# Altium PCB PCB3.PcbDoc (part 1 of 2)
Units mm, origin at the board's own origin, x right, y up, seen from the top; angles counter-clockwise.
Board outline 51.84 x 50.17 mm, 2 copper layers (Top Layer, Bottom Layer); 59 components, 46 nets, 207 pads, 49 vias.
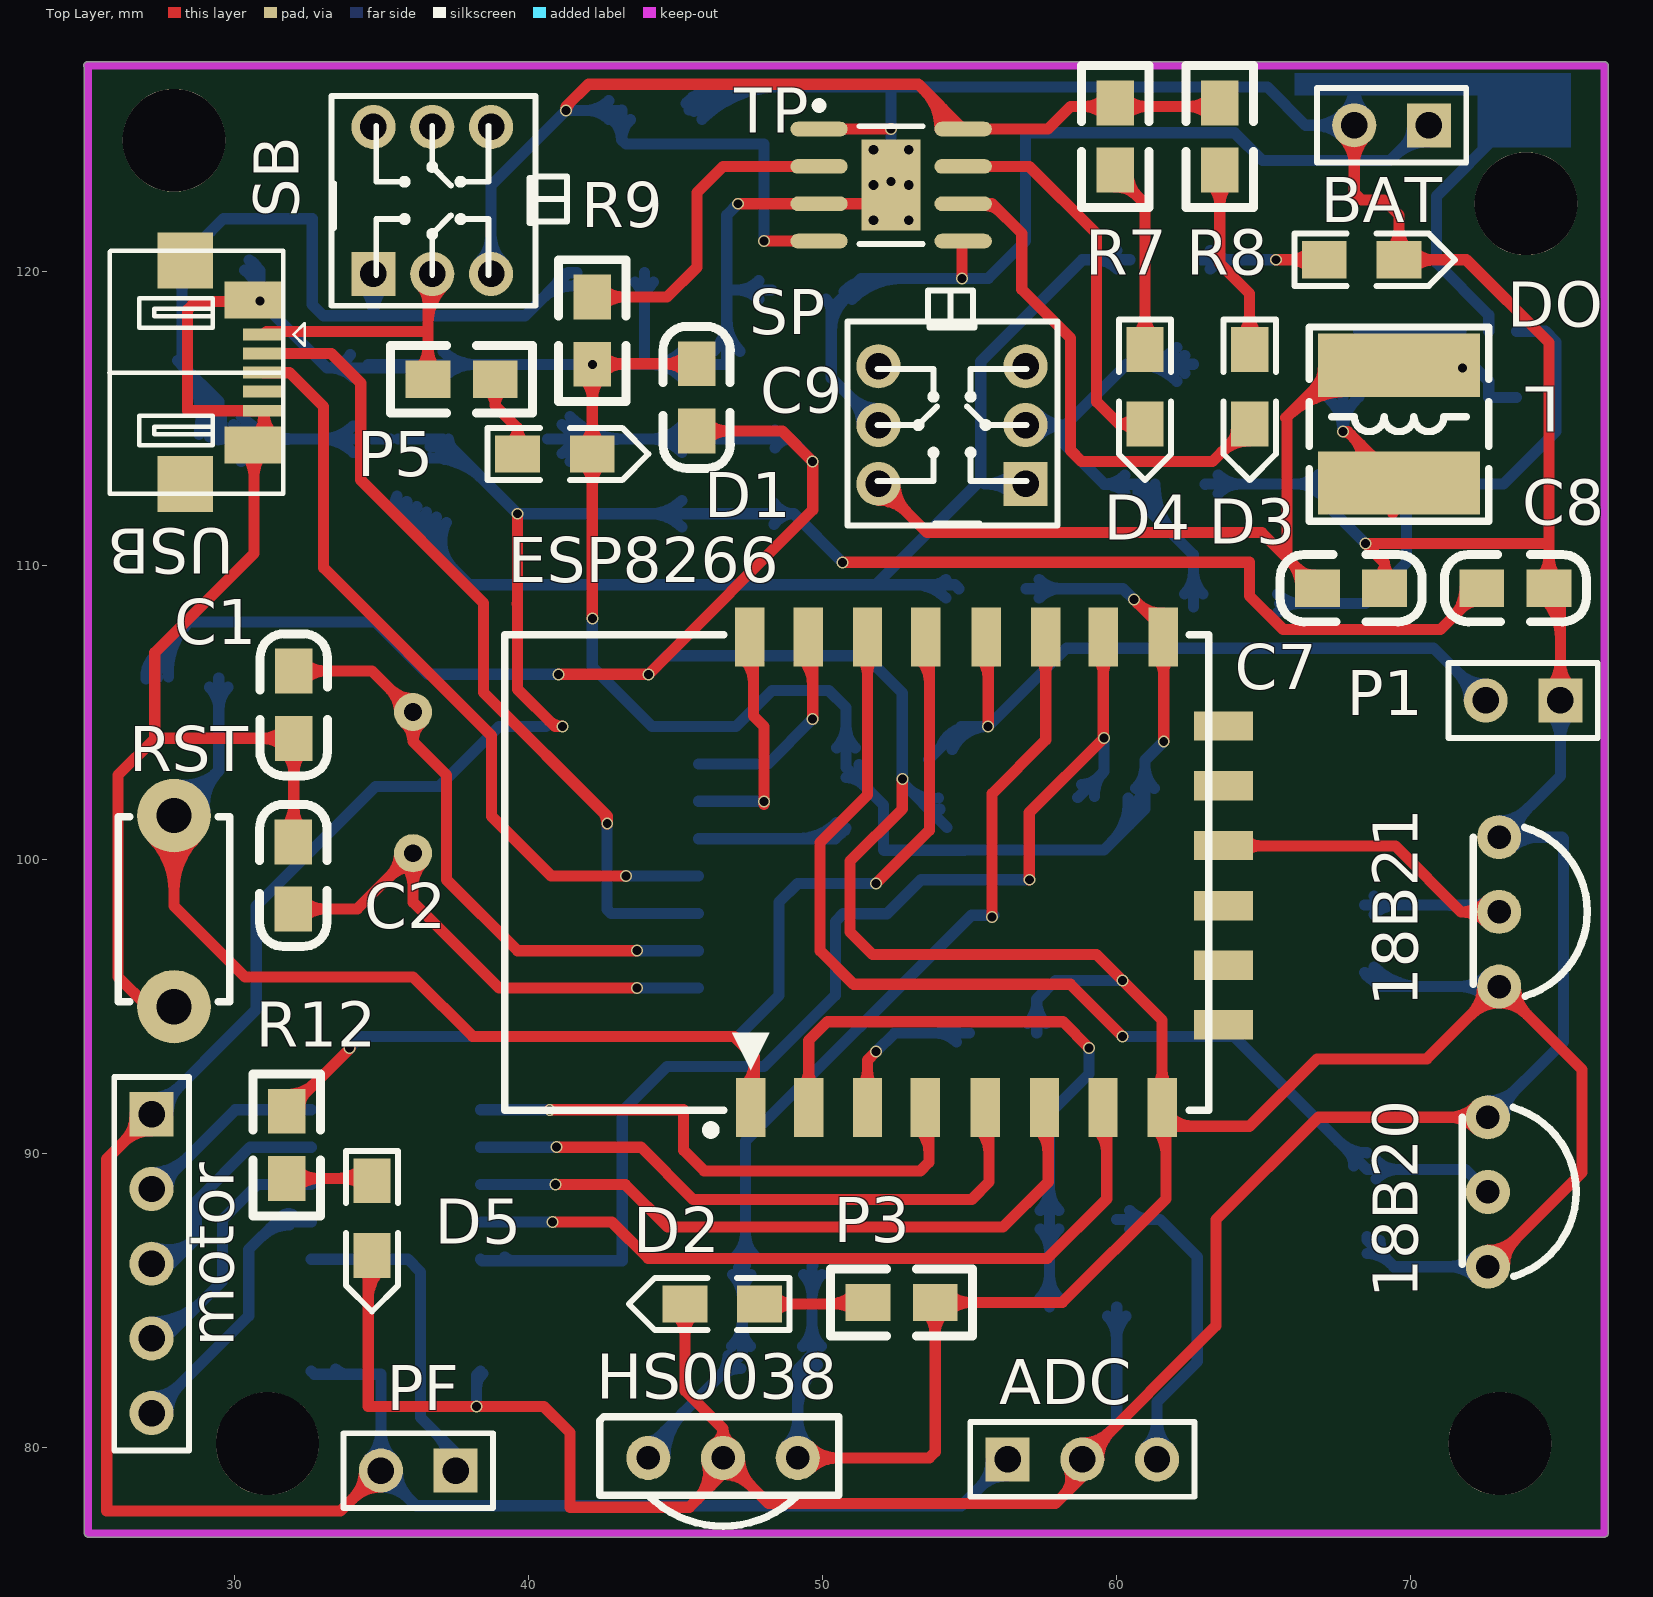
[diagram p0: Top Layer view]
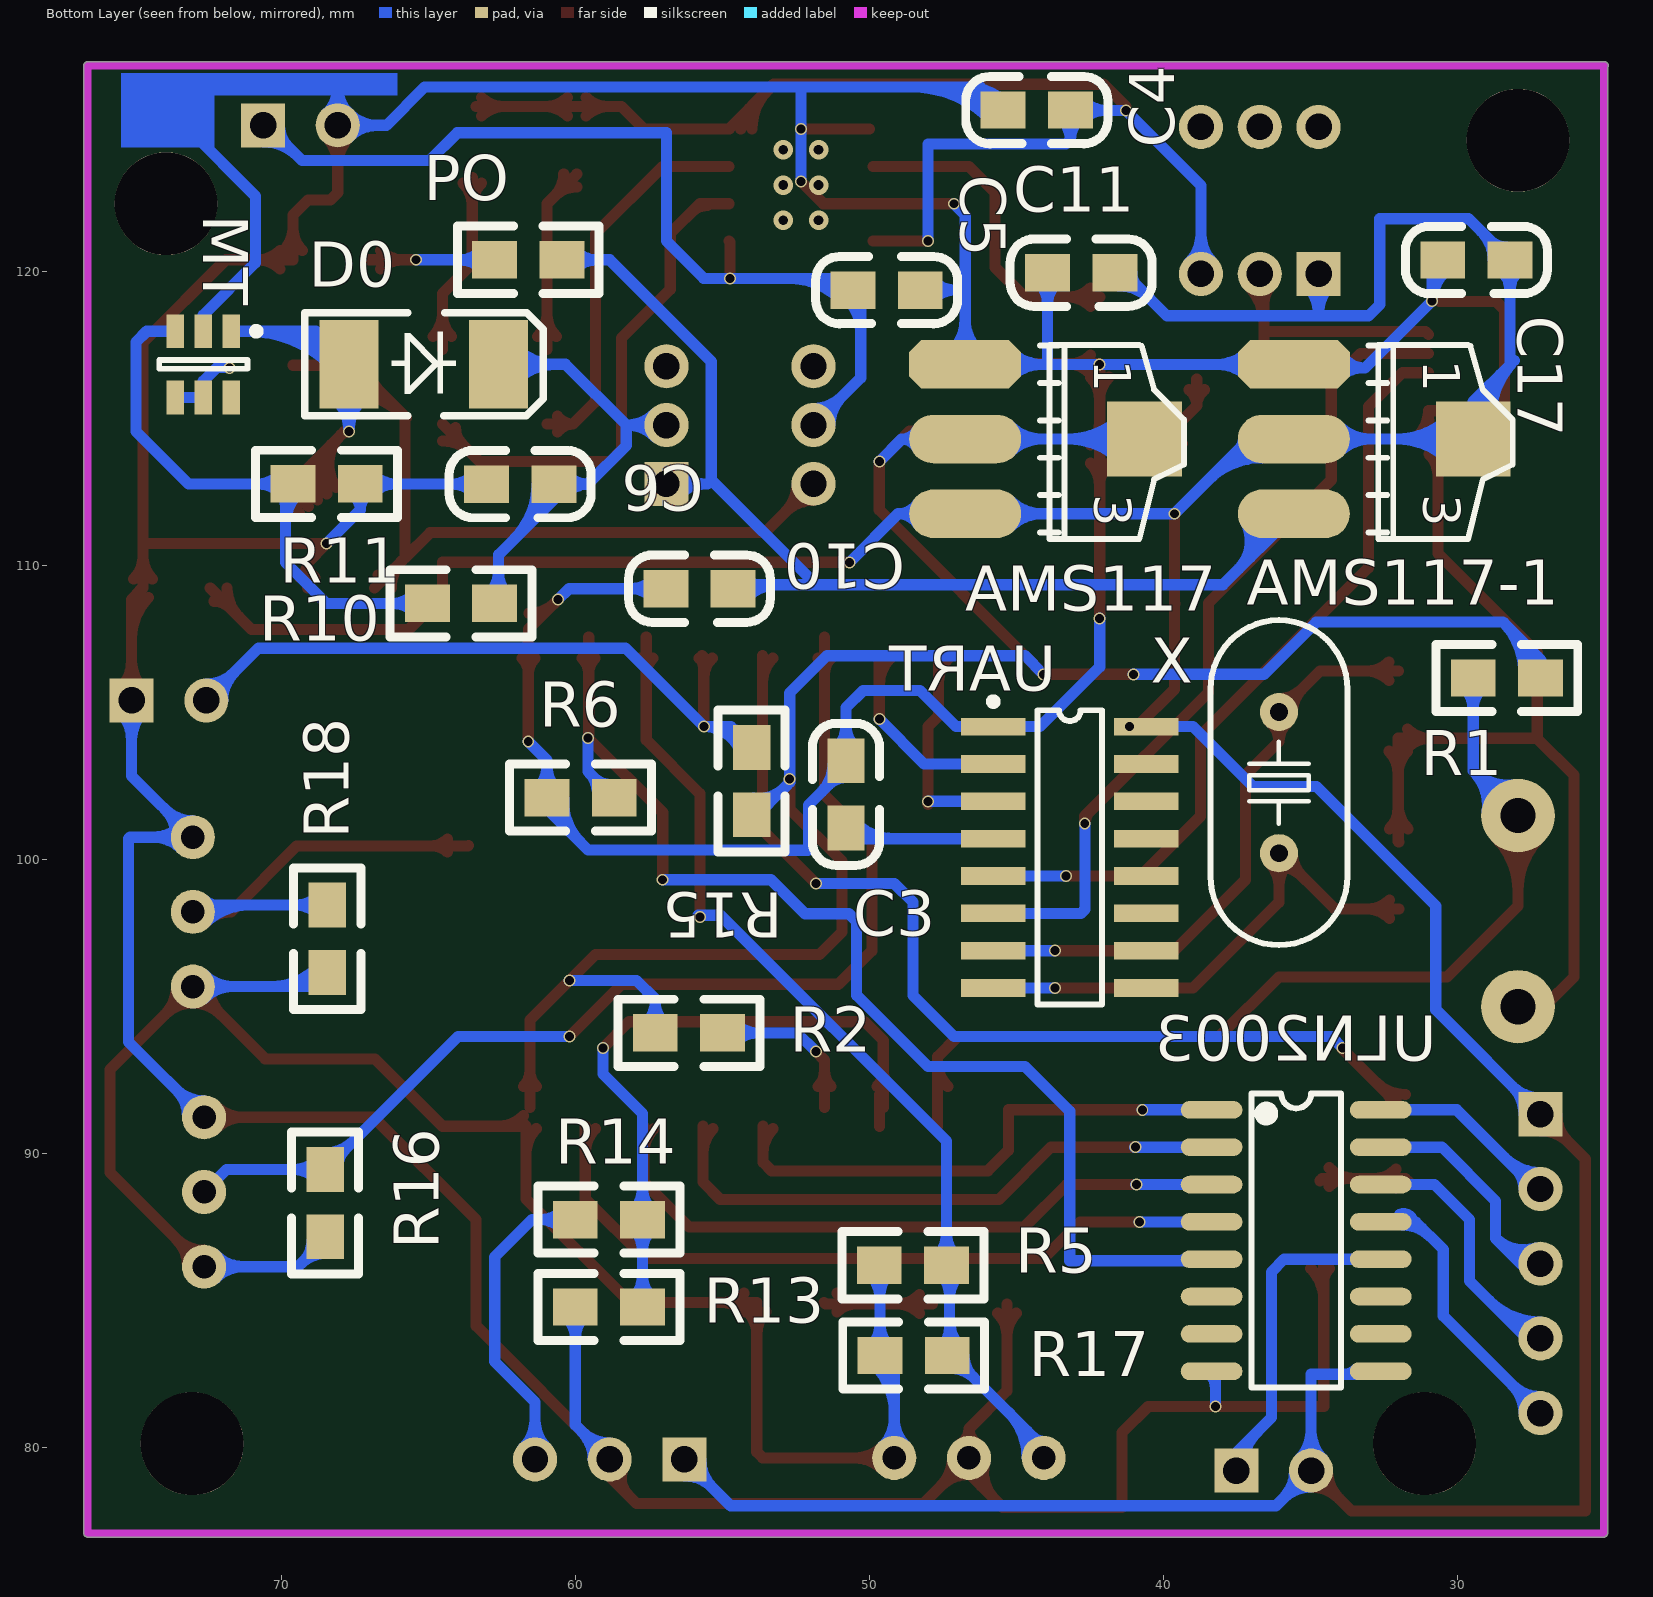
[diagram p1: Bottom Layer view, seen from below]
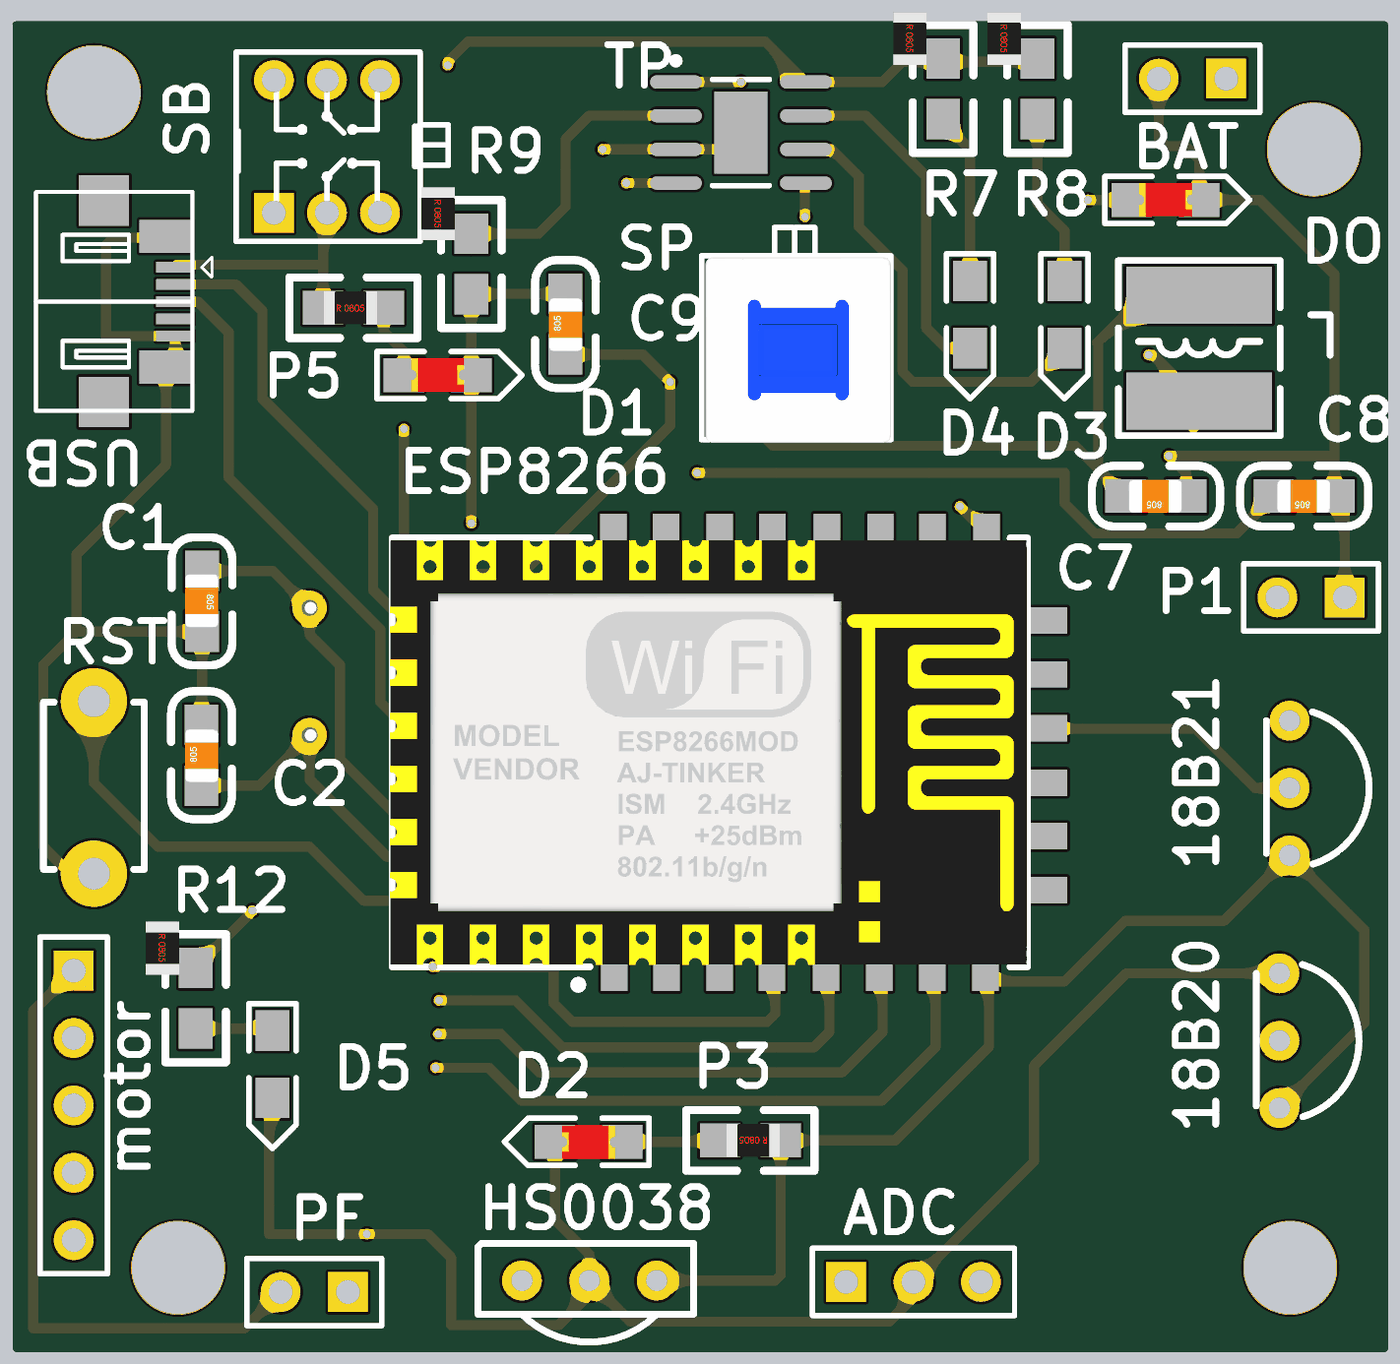
[diagram p3: 3D render of the assembled board from above, using the file's embedded part models]
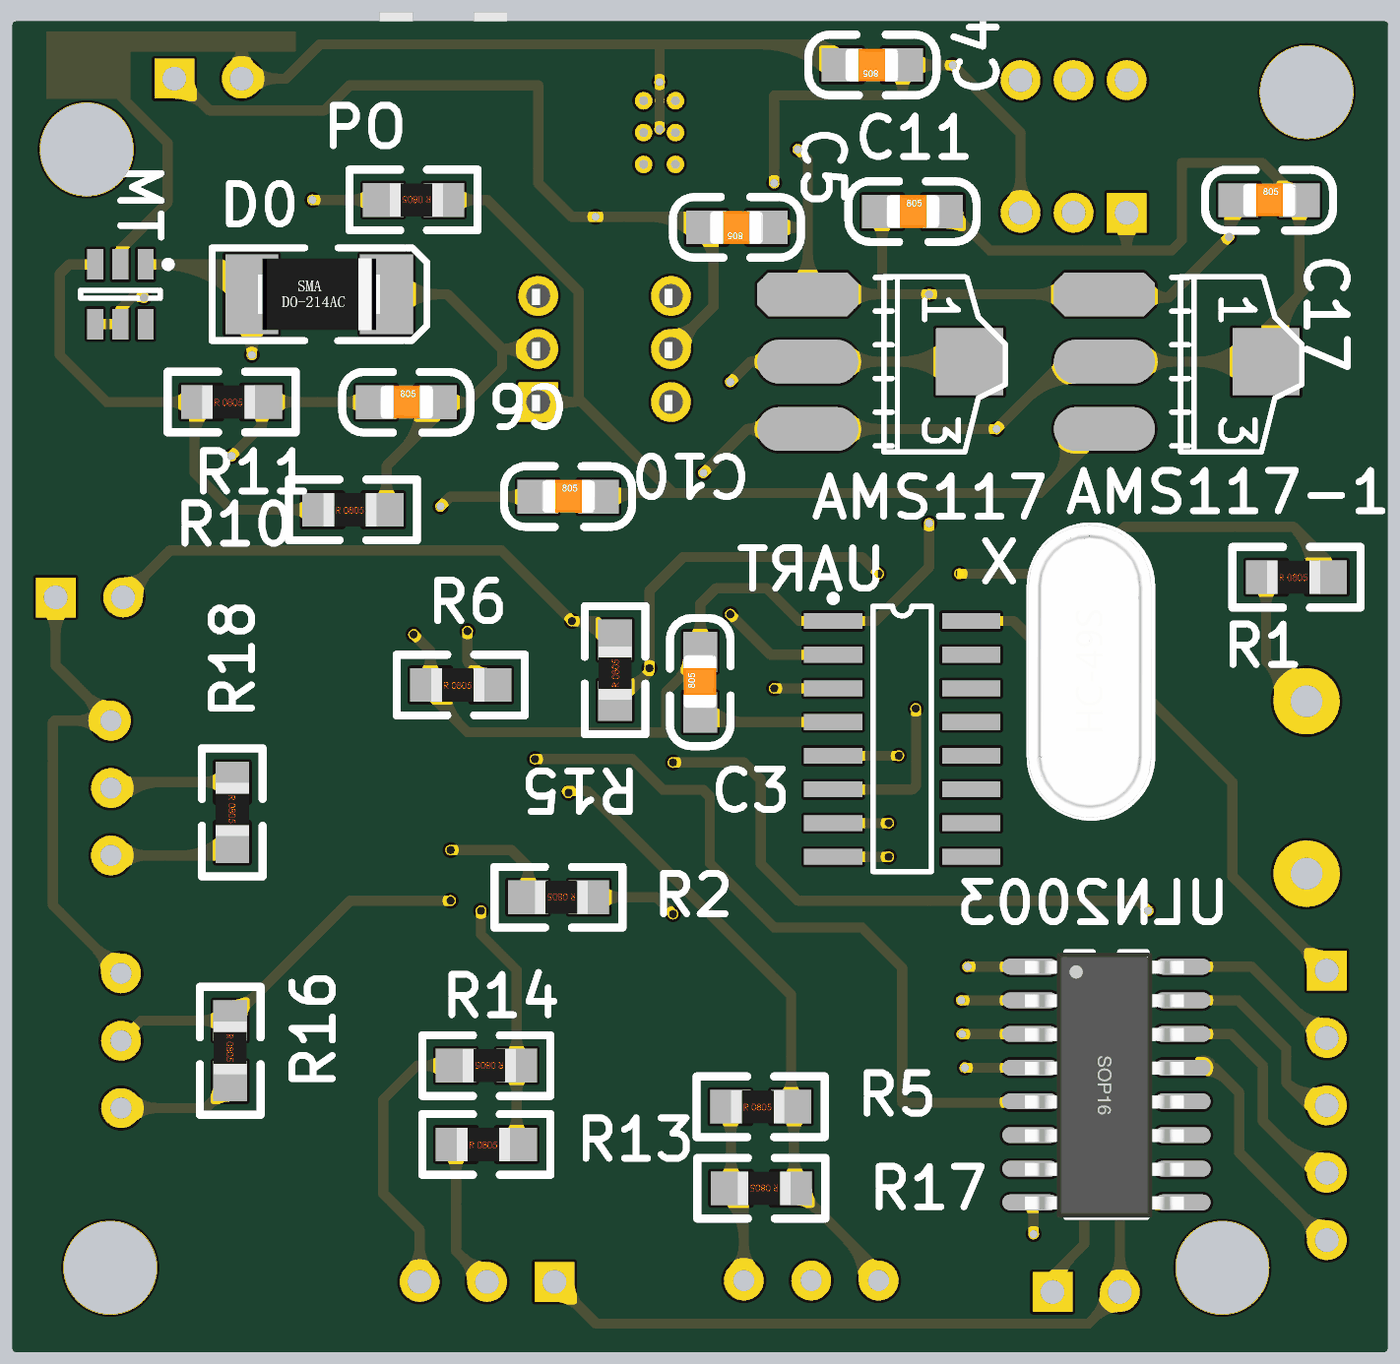
[diagram p4: 3D render of the assembled board from below, using the file's embedded part models]

## Layer stack, top to bottom
Top Layer: signal copper 0.0356
Dielectric: dielectric 0.32, FR-4, Dk 4.8
Bottom Layer: signal copper 0.0356

## Board outline
24.892,77.089 24.892,126.933 cw(c25,127) 25,127.127 76.581,127.127 cw(c76.581,127) 76.708,127 76.708,77.089 cw(c76.581,77.089) 76.581,76.962 25.019,76.962 cw(c25.019,77.089)

## Design rules (kind name [scope] priority, off if disabled: settings)
Clearance [All] p1: gap=0.254
PolygonConnect [All] p1: connectstyle=Relief reliefconductorwidth=0.254 reliefentries=4 polygonreliefangle="90 Angle"
RoutingVias [All] p1: holewidth=0.711 width=1.27 viastyle="Through Hole" minholewidth=0.711 minwidth=1.27 maxholewidth=0.711 maxwidth=1.27
SilkscreenOverComponentPads [All] p1: minsilkscreentomaskgap=0.254
SolderMaskExpansion [All] p1: expansion=0.102
TestPointUsage [All] p1: valid=0 allowmultiple=FALSE
Testpoint [All] p1: side=15 testpointundercomponent=TRUE minsize=1.016 maxsize=2.54 preferedsize=1.524 minholesize=0 maxholesize=1.016 preferedholesize=0.813 testpointgrid=0.025 style=1023 order=0123456789
Width [All] p1: maxlimit=0.635 minlimit=0.254 preferedwidth=0.254 minimp=50.000000 maximp=50.000000 favimp=50.000000
23 further rules are at their usual default settings.

## Components (designator, comment, footprint, x,y, rotation, side; value= is the part's Value field where it differs from the comment)
18B20 "DS18B20" DS18B20 72.619,91.237 r270 top
18B21 "DS18B20" DS18B20 73,100.762 r270 top
ADC "Header 3" HDR1X3 56.286,79.604 r0 top
AMS117 "AMS1117-3.3" AMS1117 46.736,116.84 r270 bottom
AMS117-1 "AMS1117-5.0" AMS1117 35.56,116.84 r270 bottom
BAT "Header 2" HDR1X2 70.612,124.968 r180 top
C1 "CAP" 0805C 32.004,104.14 r90 top
C2 "CAP" 0805C 32.004,100.584 r270 top
C3 "CAP" 0805C 50.8,101.092 r90 bottom
C4 "CAP" 0805C 43.18,125.476 r0 bottom
C5 "CAP" 0805C 48.285,119.355 r0 bottom
C6 "CAP" 0805C 62.992,112.776 r180 bottom
C7 "CAP" 0805C 69.088,109.22 r180 top
C8 "CAP" 0805C 74.676,109.22 r180 top
C9 "CAP" 0805C 45.72,116.84 r270 top
C10 "CAP" 0805C 56.896,109.22 r180 bottom
C11 "CAP" 0805C 43.917,119.964 r180 bottom
C17 "CAP" 0805C 30.48,120.396 r180 bottom
D0 "DIODE SCHOTTKY" SMA/DO-214AC 67.564,116.84 r180 bottom
D1 "LED" LED-0805R 39.624,113.792 r0 top
D2 "LED" LED-0805R 47.854,84.887 r180 top
D3 "LED" LED-0805R 64.516,117.348 r270 top
D4 "LED" LED-0805R 60.96,117.348 r270 top
D5 "LED" LED-0805R 34.671,89.078 r270 top
DO "LED" LED-0805R 67.056,120.396 r0 top
ESP8266 "ESP8266" ESP_12 47.625,91.567 r90 top
HS0038 "HS0038" HS0038 44.069,79.654 r0 top
L "INDUCTOR" CD54 69.596,114.808 r270 top
motor "Header 5" HDR1X5 27.178,91.338 r270 top
MT "MT3608" SOT23-6 72.644,116.84 r270 bottom
P1 "Header 2" HDR1X2 75.082,105.41 r180 top
P3 "RES" 0805R 53.823,84.938 r180 top
P5 "RES" 0805R 36.576,116.332 r0 top
PF "Header 2" HDR1X2 37.516,79.223 r180 top
PO "RES" 0805R 60.452,120.396 r0 bottom
R1 "RES" 0805R 29.464,106.172 r180 bottom
R2 "RES" 0805R 54.991,94.107 r0 bottom
R5 "RES" 0805R 49.657,86.208 r180 bottom
R6 "RES" 0805R 60.96,102.108 r180 bottom
R7 "RES" 0805R 59.944,123.444 r90 top
R8 "RES" 0805R 63.5,123.444 r90 top
R9 "RES" 0805R 42.164,116.84 r90 top
R10 "RES" 0805R 65.024,108.712 r180 bottom
R11 "RES" 0805R 69.596,112.776 r180 bottom
R12 "RES" 0805R 31.775,89.154 r90 top
R13 "RES" 0805R 59.995,84.785 r180 bottom
R14 "RES" 0805R 57.709,87.757 r0 bottom
R15 "RES" 0805R 54,101.524 r90 bottom
R16 "RES" 0805R 68.504,89.459 r270 bottom
R17 "RES" 0805R 47.346,83.134 r0 bottom
R18 "RES" 0805R 68.428,98.45 r270 bottom
RST "KEY" DIP-3X6X4.3 27.94,94.996 r90 top
SB "KFT DIP-7X7" "KFT DIP-7X7" 34.722,119.913 r90 top
SP "KFT DIP-7X7" "KFT DIP-7X7" 56.896,112.776 r180 top
TP "TP4056" SOP-8 52.324,122.936 r0 top
UART "CH340G" SOP16M 43.18,100.076 r270 bottom
ULN2003 "ULN2003" SOP16 38.405,91.491 r180 bottom
USB "Micro-USB" USB-MICRO_A 30.988,117.856 r270 top
X "XTAL-2P" "OSC HC-49S" 36.068,102.616 r90 bottom

## Footprints (in the part's own frame and the unit in brackets; to place one, negate y for a bottom-side part, rotate by r counter-clockwise, add the part's x,y. Pads: shape width x height; smd on the part's side, far side on the other; paste and mask are expansions set on the pad)
0805C [mil]
  rect 60x50 smd: 1(-0.71,-0.4) 2(89.29,-0.4)
  silkscreen extent -51,-45 139,45, body extent 6,-25 84,25, height 31
0805R [mil]
  rect 60x50 smd: 1(0,0) 2(90,0)
  silkscreen extent -50,-45 140,45, body extent 1,-25 80,25, height 15
AMS1117 [mil]
  oct 65x150 smd: 1(0.03,-0.06)
  oval 65x150 smd: 2(100.03,-0.06) 3(200.03,-0.06)
  rect 100x100 smd: 4(100.03,239.94)
  silkscreen extent -26,100 234,293
CD54 [mm] "5.8*5.2*4.5mm（长宽高）"
  rect 2.15x5.5 smd: 1(-2,0) 2(2,0)
  silkscreen extent -3.3,-3.05 3.3,3.05, body extent -2.75,-2.33 3,2.67, height 4
DIP-3X6X4.3 [mm]
  round 2.5 hole 1.2: 1(0,0) 3(6.5,0)
  silkscreen extent 0.16,-1.9 6.46,1.9, body extent -0.64,-1.75 7.19,1.75, height 4.31
DS18B20 [mm]
  round 1.5 hole 0.8: 1(0,0) 2(2.54,0) 3(5.08,0)
  silkscreen extent -0.33,-0.87 5.41,3
ESP_12 [mm]
  rect 2x1 smd: 1(0,0.074) 2(0,-1.896) 3(0,-3.896) 4(0,-5.866) 5(0,-7.906) 6(0,-9.916) 7(0,-11.906) 8(0,-13.916) 15(16,-13.956) 16(16,-11.916) 17(16,-9.956) 18(16,-7.936) 19(16,-5.876) 20(16,-3.896) 21(16,-1.876) 22(16,0.104)
  rect 1x2 smd: 9(2.814,-16.002) 10(4.846,-16.002) 11(6.858,-16.002) 12(8.91,-16.002) 13(10.942,-16.002) 14(12.974,-16.002)
  silkscreen extent -0.91,-15.49 16.08,8.45, body extent 0,-15.49 16.01,8.52, height 2.65
HDR1X2 [mm] "Connector; Header; 2 Position"
  rect 1.5x1.5 hole 0.9: 1(0,0)
  round 1.5 hole 0.9: 2(2.54,0)
  silkscreen extent -1.27,-1.27 3.81,1.27
HDR1X3 [mm] "Connector; Header; 3 Position"
  rect 1.5x1.5 hole 0.9: 1(0,0)
  round 1.5 hole 0.9: 2(2.54,0) 3(5.08,0)
  silkscreen extent -1.27,-1.27 6.35,1.27
HDR1X5 [mm] "Connector; Header; 5 Position"
  rect 1.5x1.5 hole 0.9: 1(0,0)
  round 1.5 hole 0.9: 2(2.54,0) 3(5.08,0) 4(7.62,0) 5(10.16,0)
  silkscreen extent -1.27,-1.27 11.43,1.27
HS0038 [mm]
  round 1.5 hole 0.8: 1(0,0) 2(2.54,0) 3(5.08,0)
  silkscreen extent -1.65,-2.32 6.48,1.4
"KFT DIP-7X7" [mm]
  rect 1.5x1.5 hole 0.9: 1(0,0)
  round 1.5 hole 0.9: 2(0,-2) 3(0,-4) 4(5,-4) 5(5,-2) 6(5,0)
  silkscreen extent -1.08,-6.58 6.06,1.42, body extent -1.09,-5.46 5.91,1.54, height 11.2
LED-0805R [mil]
  rect 60x50 smd: A(0,0) K(100,0)
  silkscreen extent -40,-35 175,35, body extent 11,-24 89,25, height 32
"OSC HC-49S" [mm]
  round 1.3 hole 0.6: 1(-2.4,0) 2(2.4,0)
  silkscreen extent -5.52,-2.32 5.52,2.33, body extent -5.53,-2.29 5.53,2.36, height 4.13
SMA/DO-214AC [mm] "塑封二极管"
  rect 2x3 smd: A(-0.127,0) K(4.953,0)
  silkscreen extent -1.63,-1.75 6.48,1.75, body extent 0.11,-1.35 4.71,1.35, height 2.4
SOP16 [mm]
  oval 2.1x0.6 smd: 1(0.046,0) 2(0.046,-1.27) 3(0.046,-2.54) 4(0.046,-3.81) 5(0.046,-5.08) 6(0.046,-6.35) 7(0.046,-7.62) 8(0.046,-8.89) 9(5.796,-8.89) 10(5.796,-7.62) 11(5.796,-6.35) 12(5.796,-5.08) 13(5.796,-3.81) 14(5.796,-2.54) 15(5.796,-1.27) 16(5.796,0)
  silkscreen extent 1.4,-9.45 4.44,0.56, body extent -0.15,-9.47 5.85,0.53, height 1.9
SOP16M [mm]
  rect 0.6x2.2 smd: 1(-4.445,-2.6) 2(-3.175,-2.6) 3(-1.905,-2.6) 4(-0.635,-2.6) 5(0.635,-2.6) 6(1.905,-2.6) 7(3.175,-2.6) 8(4.445,-2.6) 9(4.445,2.6) 10(3.175,2.6) 11(1.905,2.6) 12(0.635,2.6) 13(-0.635,2.6) 14(-1.905,2.6) 15(-3.175,2.6) 16(-4.445,2.6)
  silkscreen extent -5.42,-2.72 5,1.1
SOP-8 [mm] "SOP, 8-Leads, Body 4.0x3.8mm (max), Pitch 1.27mm, IPC Medium Density"
  oval 1.95x0.5 smd: 1(-2.45,1.905) 2(-2.45,0.635) 3(-2.45,-0.635) 4(-2.45,-1.905) 5(2.45,-1.905) 6(2.45,-0.635) 7(2.45,0.635) 8(2.45,1.905)
  rect 2x3.1 smd: 9(0,0)
  silkscreen extent -2.57,-2 1.07,2.83, body extent -1.92,-1.97 1.92,1.97, height 1.75
SOT23-6 [mm] "SOT23, 6-Leads, Body 3.0x2.9mm (max), Pitch 0.95mm, IPC Medium Density"
  rect 1.15x0.6 smd: 1(-1.125,0.95) 2(-1.125,0) 3(-1.125,-0.95) 4(1.125,-0.95) 5(1.125,0) 6(1.125,0.95)
  silkscreen extent -1.25,-1.5 0.15,1.92, body extent -0.7,-1.5 0.7,1.5, height 0.8
USB-MICRO_A [mm]
  rect 1.9x1.9 smd: 0(-2.515,-2.667) 0(5.08,-2.667)
  rect 0.4x1.4 smd: 1(0,0) 2(0.648,0) 3(1.295,0) 4(1.943,0) 5(2.591,0)
  rect 1.25x2 smd: 5(-1.168,-0.33) 5(3.759,-0.33)
  silkscreen extent -2.84,-5.24 5.41,1.4, body extent -2.71,-5.08 5.25,0.34, height 2.69

## Part data
ADC: "Header, 3-Pin"
AMS117 AMS117-1: library part AMS1117
BAT P1 PF: "Header, 2-Pin"
C1 C2 C3 C4 C5 C6 C7 C8 C9 C10 C11 C17: "无极性电容"
D0: "肖特基二极管"
motor: "Header, 5-Pin"
UART: "USB2UART"
X: "2脚无源脚晶振"

## Free pads (board coordinates)
  round 3.5 hole 3.5: 0(73.914,122.301) 1(27.94,124.46) 2(31.115,80.137) 3(73.025,80.137)

## Via types
v1: diameter 0.406, hole 0.305, Top Layer to Bottom Layer, 43 vias
v2: diameter 0.66, hole 0.33, Top Layer to Bottom Layer, tented top, 6 vias

## Nets (pads, with @x,y where several pads share a name; then routed paths per layer and width w, separated by ;. In a path a pad name is that pad's centre, name@x,y a point inside that pad or via, vN(x,y) a via of type N, cw(c..) or ccw(c..) an arc to the next point about the centre after c; other vN are vias at no path point)
3V3: 18B20.3 18B21.3 AMS117.2 AMS117.4 C9.2 ESP8266.8 HS0038.3 P3.1 R1.2 R2.2 R5.1 R15.1 R16.2 R17.2 R18.2 | length 197.2
  Top Layer w0.381: v1(41.021,106.299) v1(44.069,106.299) 49.657,111.887 v1(49.657,113.538) 48.623,114.572 C9.2@45.71,114.572 ; C9.2@46.024,114.258 cw(c46.783,113.499) 46.783,114.572 cw(c46.783,115.645) C9.2@46.024,114.886 ; HS0038.3@49.149,79.654 53.619,79.654 53.823,79.858 P3.1@53.823,84.938 58.141,84.938 61.668,88.465 ESP8266.8@61.668,90.932 ; HS0038.3@49.545,79.259 cw(c50.5,78.304) 50.5,79.654 cw(c50.5,81.005) HS0038.3@49.545,80.05 ; v1(52.705,102.743) 52.705,101.727 50.927,99.949 50.927,97.536 51.689,96.774 59.309,96.774 v1(60.198,95.885) 61.541,94.542 ESP8266.8@61.541,91.567 ; P3.1@53.508,84.623 cw(c52.749,83.864) 53.823,83.864 cw(c54.896,83.864) P3.1@54.137,84.623 ; P3.1@54.264,84.623 cw(c55.023,83.864) 55.023,84.938 cw(c55.023,86.011) P3.1@54.264,85.252 ; ESP8266.8@61.322,90.848 cw(c60.487,90.013) 61.668,90.013 ; ESP8266.8@61.322,92.286 ccw(c60.793,92.814) 61.541,92.814 ccw(c62.288,92.814) ESP8266.8@61.76,92.286 ; ESP8266.8@61.722,90.986 ESP8266.8@61.668,90.932 ; ESP8266.8@61.76,91.286 ccw(c62.614,92.14) 62.614,90.932 ; 18B21.3@72.44,95.682 cw(c71.089,95.682) 72.044,94.727 cw(c73,93.772) 73,95.122 cw(c73,93.772) 73.955,94.727 cw(c74.91,95.682) 18B21.3@73.559,95.682 ; 18B20.3@72.619,86.157 75.819,89.357 75.819,92.862 18B21.3@73,95.682 70.536,93.218 66.802,93.218 64.516,90.932 ESP8266.8@61.668,90.932 ; 18B20.3@72.619,86.716 ccw(c72.619,88.067) 73.574,87.112 ccw(c74.529,86.157) 18B20.3@73.178,86.157
  Bottom Layer w0.381: R1.2@26.988,106.15 cw(c27.946,106.217) 27.267,106.896 ; R1.2@27.178,106.172 27.178,106.807 28.448,108.077 ; R1.2@27.368,106.176 cw(c29.048,106.295) 27.857,107.486 ; R1.2@27.748,106.203 cw(c30.151,106.374) 28.448,108.077 ; AMS117.4@40.642,114.299 AMS117.2@46.738,114.299 48.896,114.299 ; v1(41.021,106.299) 36.576,106.299 34.798,108.077 28.448,108.077 ; AMS117.4@41.136,113.805 cw(c42.328,112.613) 42.328,114.299 cw(c42.328,115.986) AMS117.4@41.136,114.793 ; AMS117.4@41.405,113.536 cw(c43.248,111.693) 43.248,114.299 cw(c43.248,116.905) AMS117.4@41.405,115.062 ; v1(44.069,106.299) 44.704,106.934 51.435,106.934 52.705,105.664 v1(52.705,102.743) 52.705,102.616 R15.1@54.229,101.092 ; AMS117.2@45.209,113.85 ccw(c44.125,112.766) 44.125,114.299 ccw(c44.125,115.832) AMS117.2@45.209,114.748 ; AMS117.2@48.372,113.991 cw(c48.896,113.701) 48.896,114.299 ; AMS117.2@48.372,114.607 ccw(c48.896,114.898) 48.896,114.299 ; HS0038.3@48.753,80.05 ccw(c47.798,81.005) 49.149,81.005 ccw(c50.5,81.005) HS0038.3@49.545,80.05 ; HS0038.3@49.149,79.654 49.149,82.652 R17.2@49.632,83.134 49.632,86.182 R5.1@49.657,86.208 ; 49.149,81.203 cw(c51.436,81.203) R17.2@49.819,82.82 ; 49.149,82.122 cw(c50.516,82.122) R17.2@49.55,83.089 ; R17.2@49.317,83.449 ccw(c48.558,84.207) 49.632,84.207 ccw(c50.705,84.207) R17.2@49.946,83.449 ; R5.1@49.343,85.893 cw(c48.645,85.196) 49.632,85.196 ; 49.632,85.073 cw(c50.791,85.073) R5.1@49.971,85.893 ; v1(49.657,113.538) 48.896,114.299 ; v1@52.718,102.743 ccw(c53.055,102.743) 52.816,102.505 ; 52.87,102.451 ccw(c53.767,103.348) R15.1@53.94,102.091 ; R15.1@53.413,101.908 ccw(c53.898,102.394) R15.1@53.992,101.714 ; R2.2@56.963,94.421 ccw(c56.204,95.18) 57.277,95.18 ccw(c58.35,95.18) R2.2@57.591,94.421 ; R2.2@57.277,94.107 57.277,95.25 57.912,95.885 v1(60.198,95.885) ; R18.2@68.428,96.164 68.91,95.682 18B21.3@73,95.682 ; R18.2@68.473,96.082 ccw(c69.439,97.049) 69.439,95.682 ; R16.2@68.504,86.601 cw(c68.504,85.467) 69.306,86.269 ; R16.2@68.504,87.173 68.504,87.071 69.418,86.157 18B20.3@72.619,86.157 ; R18.2@68.742,96.352 ccw(c70.359,97.969) 70.359,95.682 ; R16.2@68.948,87.046 ccw(c69.96,87.046) 69.245,86.33 ; 18B20.3@72.223,85.761 ccw(c71.268,84.806) 71.268,86.157 ccw(c71.268,87.508) 18B20.3@72.223,86.552 ; 18B21.3@72.604,95.286 ccw(c71.649,94.331) 71.649,95.682 ccw(c71.649,97.033) 18B21.3@72.604,96.077
5V: ADC.1 AMS117-1.2 AMS117-1.4 AMS117.3 C8.2 C11.2 C17.2 motor.1 PF.2 SB.1 UART.16 ULN2003.9 | length 199.9
  Top Layer w0.381: motor.1@26.619,91.338 cw(c25.268,91.338) 26.223,90.383 cw(c27.178,89.428) motor.1@27.178,90.779 ; motor.1@27.178,91.338 25.654,89.814 25.654,77.851 33.604,77.851 PF.2@34.976,79.223 ; PF.2@34.416,79.223 cw(c33.066,79.223) 34.021,78.267 cw(c34.976,77.312) PF.2@34.976,78.663 ; 39.614,108.702 39.624,108.712 ; v1(39.624,111.76) 39.624,108.712 ; 40.693,104.722 ccw(c41.148,105.178) v1@41.148,104.534 ; v1(41.148,104.521) 40.894,104.521 39.624,105.791 39.624,108.712 ; v1(50.673,110.109) 64.516,110.109 64.516,108.966 65.659,107.823 71.001,107.823 C8.2@72.408,109.23 ; 71.432,108.255 ccw(c70.457,109.23) C8.2@71.836,109.23 ; 71.739,108.561 cw(c72.281,108.019) C8.2@72.281,108.786
  Bottom Layer w0.381: motor.1@27.178,91.338 30.734,94.894 30.734,98.425 34.798,102.489 36.957,102.489 38.989,104.521 UART.16@40.58,104.521 ; motor.1@27.178,91.898 ccw(c27.178,93.249) 28.133,92.294 ccw(c29.088,91.338) motor.1@27.737,91.338 ; C17.2@27.898,120.072 cw(c27.139,119.313) 28.212,119.313 cw(c29.285,119.313) C17.2@28.526,120.072 ; 28.064,116.97 cw(c26.156,115.062) AMS117-1.4@28.785,114.456 ; C17.2@28.339,120.83 ccw(c28.339,121.597) 28.881,121.055 ; 28.55,116.484 cw(c26.946,114.88) AMS117-1.4@29.156,114.371 ; C17.2@28.783,120.386 cw(c30.163,120.386) 29.188,121.361 ; 29.036,115.998 cw(c27.736,114.698) AMS117-1.4@29.527,114.285 ; AMS117-1.4@29.431,114.265 AMS117-1.4@29.466,114.299 ; AMS117-1.4@29.96,113.805 cw(c31.152,112.613) 31.152,114.299 cw(c31.152,115.986) AMS117-1.4@29.96,114.793 ; AMS117-1.4@30.229,113.536 cw(c32.072,111.693) 32.072,114.299 cw(c32.072,116.905) AMS117-1.4@30.229,115.062 ; ULN2003.9@32.609,82.601 32.71,82.499 34.976,82.499 PF.2@34.976,79.223 36.17,78.028 54.711,78.028 ADC.1@56.286,79.604 ; ULN2003.9@33.436,82.678 ccw(c33.868,83.11) 33.868,82.499 ; AMS117-1.2@34.033,113.85 ccw(c32.949,112.766) 32.949,114.299 ccw(c32.949,115.832) AMS117-1.2@34.033,114.748 ; SB.1@34.326,119.518 cw(c33.371,118.563) 34.722,118.563 cw(c36.073,118.563) SB.1@35.117,119.518 ; PF.2@34.58,79.618 ccw(c33.625,80.573) 34.976,80.573 ccw(c36.327,80.573) PF.2@35.371,79.618 ; SB.1@34.722,119.913 34.722,118.544 34.669,118.491 ; PF.2@34.976,78.663 cw(c34.976,77.312) 35.931,78.267 cw(c36.886,79.223) PF.2@35.535,79.223 ; AMS117-1.2@35.306,114.299 AMS117-1.4@29.466,114.299 ; AMS117-1.2@35.562,114.299 37.085,114.299 v1(39.624,111.76) ; AMS117-1.2@36.641,113.664 cw(c36.641,111.06) 38.483,112.901 ; AMS117-1.2@36.641,114.045 cw(c36.641,112.361) 37.832,113.552 ; AMS117-1.2@37.276,114.299 ccw(c37.738,114.299) 37.411,113.973 ; v1(39.624,111.76) AMS117.3@46.738,111.759 49.023,111.759 ; 40.455,119.068 cw(c41.522,118.001) C11.2@41.522,119.51 ; C11.2@40.89,119.503 ccw(c40.44,119.954) C11.2@41.077,119.954 ; C11.2@41.649,119.954 41.341,119.954 39.878,118.491 34.669,118.491 ; AMS117.3@45.209,111.31 ccw(c44.125,110.226) 44.125,111.759 ccw(c44.125,113.292) AMS117.3@45.209,112.208 ; AMS117.3@48.341,111.4 cw(c49.023,110.932) 49.023,111.759 ; AMS117.3@48.341,112.118 ccw(c49.023,112.586) 49.023,111.759 ; v1(50.673,110.109) 49.023,111.759 ; ADC.1@55.727,79.604 cw(c54.376,79.604) 55.331,78.648 cw(c56.286,77.693) ADC.1@56.286,79.044 ; AMS117-1.4@29.466,114.299 29.466,115.568 28.212,116.822 C17.2@28.212,120.386 29.619,121.793 32.639,121.793 32.639,118.872 33.02,118.491 34.669,118.491
ADC: ESP8266.2 R13.2 R14.1 | length 29.1
  Top Layer w0.381: ESP8266.2@49.302,92.286 ccw(c48.773,92.814) 49.521,92.814 ccw(c50.268,92.814) ESP8266.2@49.74,92.286 ; ESP8266.2@49.521,91.567 49.521,93.844 50.165,94.488 58.166,94.488 v1(59.055,93.599) ; ESP8266.2@49.648,90.932 ESP8266.2@49.648,92.015
  Bottom Layer w0.381: R13.2@57.394,85.1 ccw(c56.636,85.858) 57.709,85.858 ccw(c58.782,85.858) R13.2@58.023,85.1 ; R14.1@57.394,87.443 cw(c56.636,86.684) 57.709,86.684 cw(c58.782,86.684) R14.1@58.023,87.443 ; R14.1@57.394,88.071 ccw(c56.636,88.83) 57.709,88.83 ccw(c58.782,88.83) R14.1@58.023,88.071 ; R13.2@57.709,84.785 R14.1@57.709,87.757 57.709,91.364 59.055,92.71 v1(59.055,93.599)
ADCIN: ADC.3 R14.2 | length 14.5
  Bottom Layer w0.381: R14.2@59.995,87.757 61.468,87.757 62.738,86.487 62.738,82.931 61.366,81.559 ADC.3@61.366,79.604 ; R14.2@60.436,87.443 cw(c61.195,86.684) 61.195,87.757 cw(c61.195,88.83) R14.2@60.436,88.071 ; ADC.3@60.971,79.999 ccw(c60.016,80.954) 61.366,80.954 ccw(c62.717,80.954) ADC.3@61.762,79.999
BAT+: BAT.1 C5.2 SP.5 TP.5 | length 40.8
  Top Layer w0.381: v1(54.737,119.761) 54.737,120.994 TP.5@54.774,121.031
  Bottom Layer w0.381: C5.2@50.112,119.05 cw(c49.678,118.616) 50.292,118.616 ; 50.292,117.967 cw(c51.824,117.967) C5.2@50.741,119.05 ; C5.2@50.725,119.32 cw(c51.79,118.255) 51.79,119.761 ; C5.2@50.995,119.05 cw(c52.71,117.335) 52.71,119.761 ; SP.5@51.337,114.776 ccw(c49.986,114.776) 50.941,115.731 ccw(c51.896,116.686) SP.5@51.896,115.335 ; SP.5@51.896,114.776 50.292,116.38 50.292,118.745 51.308,119.761 v1(54.737,119.761) 55.626,119.761 56.896,121.031 56.896,124.714 64.008,124.714 64.949,123.773 69.29,123.773 70.485,124.968 BAT.1@70.612,124.968 ; 69.44,123.923 cw(c70.612,122.751) BAT.1@70.612,124.409 ; 69.747,124.23 ccw(c69.008,124.968) BAT.1@70.053,124.968
BVCC: C6.2 D0.K R10.2 SP.2 | length 28.7
  Bottom Layer w0.381: SP.2@56.896,114.776 58.261,114.776 ; SP.2@57.292,114.38 cw(c58.247,113.425) 58.247,114.776 cw(c58.247,116.127) SP.2@57.292,115.172 ; C6.2@60.272,112.462 ccw(c59.573,111.809) 59.573,112.766 ; C6.2@60.272,113.069 cw(c59.573,113.722) 59.573,112.766 ; C6.2@60.914,112.766 ccw(c62.619,112.766) 61.414,111.56 ; C6.2@61.295,112.766 ccw(c63.92,112.766) 62.064,110.91 ; D0.K@62.039,116.268 ccw(c60.657,114.886) 60.657,116.84 ccw(c60.657,118.794) D0.K@62.039,117.412 ; R10.2@62.297,109.026 ccw(c61.538,109.785) 62.611,109.785 ccw(c63.684,109.785) R10.2@62.925,109.026 ; D0.K@62.308,116.537 ccw(c61.577,115.806) 61.577,116.84 ccw(c61.577,117.874) D0.K@62.308,117.143 ; R10.2@62.611,108.585 62.611,110.363 60.724,112.25 C6.2@60.724,112.766 59.573,112.766 ; D0.K@62.611,116.84 60.325,116.84 58.261,114.776 ; 58.261,114.776 58.261,114.078 59.573,112.766
CH_PD: ESP8266.3 R2.1 | length 8.3
  Top Layer w0.381: ESP8266.3@51.302,92.286 ccw(c50.773,92.814) 51.521,92.814 ccw(c52.268,92.814) ESP8266.3@51.74,92.286 ; ESP8266.3@51.521,91.567 51.521,93.177 v1(51.816,93.472)
  Bottom Layer w0.381: v1(51.816,93.472) 52.451,94.107 R2.1@54.991,94.107 ; R2.1@54.55,93.793 ccw(c53.791,93.034) 53.791,94.107 ccw(c53.791,95.18) R2.1@54.55,94.421
CHRG: D4.K TP.7 | length 14.4
  Top Layer w0.381: TP.7@54.774,123.571 57.023,123.571 59.309,121.285 59.309,115.57 60.071,114.808 ; D4.K@60.604,114.541 ccw(c60.071,114.141) 60.071,114.808 ; D4.K@60.604,115.075 cw(c60.071,115.475) 60.071,114.808 ; D4.K@60.96,114.808 60.071,114.808
D+: UART.5 USB.3 | length 26.7
  Top Layer w0.381: USB.3@30.988,116.561 30.991,116.557 31.872,116.557 33.02,115.41 33.02,109.925 38.735,104.21 38.735,101.473 40.767,99.441 v1(43.307,99.441)
  Bottom Layer w0.381: v1(43.307,99.441) UART.5@45.78,99.441
D-: UART.6 USB.2 | length 28.8
  Top Layer w0.381: USB.2@30.991,117.205 USB.2@30.988,117.208 33.287,117.208 34.29,116.205 34.29,112.903 38.467,108.726 38.467,105.678 42.672,101.473 v1(42.672,101.219) ; 42.471,101.674 cw(c42.015,101.219) v1@42.659,101.219
  Bottom Layer w0.381: v1(42.672,101.219) 42.659,101.206 42.659,98.311 42.799,98.171 UART.6@45.78,98.171